# Altium PCB 20K Control Board V1.1.PcbDoc (part 19 of 24)
Units mm, origin at the board's own origin, x right, y up, seen from the top; angles counter-clockwise.
Board outline 132 x 260 mm, 4 copper layers (Top Layer, GND, VCC, Bottom Layer); 1384 components, 779 nets, 4515 pads, 1774 vias.
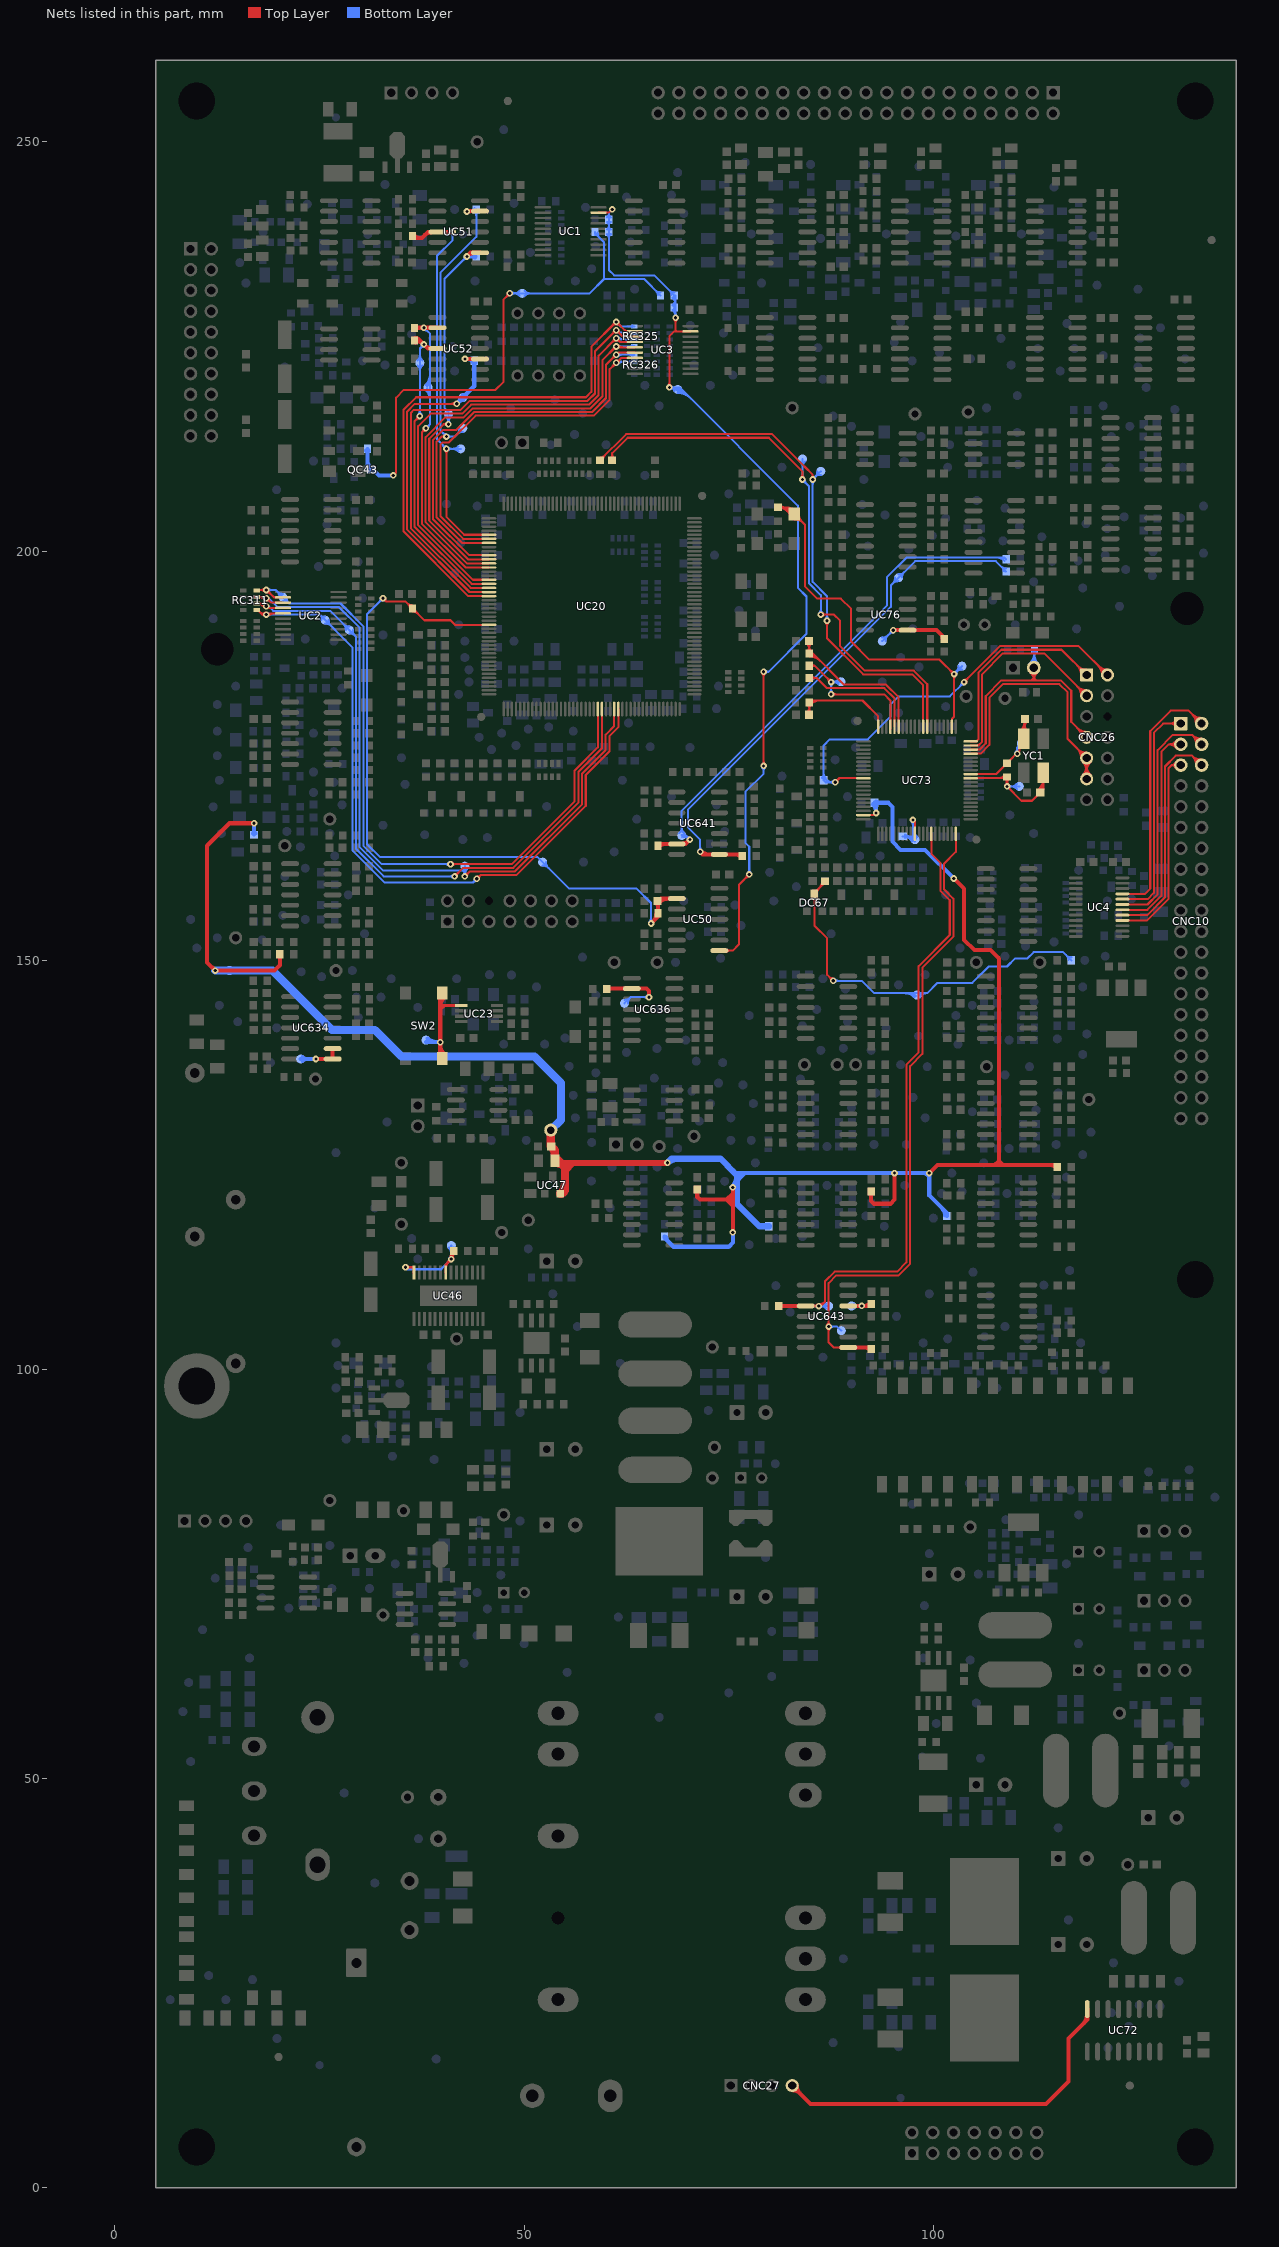
[diagram p21: the nets of this part, all layers, seen from the top]

## Via types
v1: diameter 0.8, hole 0.4, Top Layer to Bottom Layer, tented both sides, 1354 vias
v2: diameter 1.2, hole 0.7, Top Layer to Bottom Layer, 261 vias
v3: diameter 0.8, hole 0.4, Top Layer to Bottom Layer, 58 vias
v4: diameter 1.2, hole 0.7, Top Layer to Bottom Layer, tented top, 58 vias
v5: diameter 0.8, hole 0.4, Top Layer to Bottom Layer, tented top, 22 vias
v6: diameter 1.2, hole 0.7, Top Layer to Bottom Layer, tented both sides, 13 vias
v7: diameter 1.2, hole 0.7, Top Layer to Bottom Layer, tented bottom, 8 vias

## Nets (pads, with @x,y where several pads share a name; then routed paths per layer and width w, separated by ;. In a path a pad name is that pad's centre, name@x,y a point inside that pad or via, vN(x,y) a via of type N, cw(c..) or ccw(c..) an arc to the next point about the centre after c; other vN are vias at no path point) (continued)
NetRC661_2: pad.6@84,211.25 RC661.2 UC73.68 | length 81.2
  Top Layer w0.25: RC661.2@60.52,211.33 ccw(c59.965,211.885) 60.75,211.885 ccw(c61.535,211.885) RC661.2@60.98,211.33 ; RC661.2@60.75,211.1 60.75,211.964 62.636,213.85 79.9,213.85 84,209.75 v1(84,208.75) ; v1(86.25,192.25) 87.85,192.25 88.6,191.5 88.6,188.4 91.6,185.4 97.6,185.4 99.25,183.75 UC73.68@99.25,178.55 ; v1@86.444,192.056 cw(c86.914,191.586) 86.914,192.25 cw(c86.914,192.914) v1@86.444,192.444 ; 84,209.414 ccw(c84.664,209.414) 84.194,208.944 cw(c84.664,209.414) 84,209.414 ; 84,209.414 cw(c83.336,209.414) 83.806,208.944 ccw(c83.336,209.414) 84,209.414
  Bottom Layer w0.25: pad.6@83.699,210.949 cw(c82.974,210.224) 84,210.224 cw(c85.026,210.224) pad.6@84.301,210.949 ; v1@83.806,208.944 ccw(c83.336,209.414) 84,209.414 ccw(c84.664,209.414) v1@84.194,208.944 ; pad.6@84,211.25 v1(84,208.75) 84.8,207.95 84.8,196.064 86.25,194.614 v1(86.25,192.25) ; v1@86.056,192.444 ccw(c85.586,192.914) 86.25,192.914 ccw(c86.914,192.914) v1@86.444,192.444 ; 84.469,208.281 ccw(c84,207.811) 84,208.475 cw(c84,207.811) 84.469,208.281 ; 84.469,208.281 cw(c84.939,208.75) 84.275,208.75 ccw(c84.939,208.75) 84.469,208.281
NetRC665_2: pad.ICT@86.25,209.75 RC665.2 UC73.69 | length 80
  Top Layer w0.25: RC665.2@59.25,211.1 62.45,214.3 80.291,214.3 85.25,209.341 ; RC665.2@59.3,211.425 ccw(c59.3,212.089) 59.769,211.619 ; RC665.2@59.625,211.1 cw(c60.53,211.1) 59.89,211.74 ; 84.25,210.341 85.25,209.341 ; v1@85.073,208.96 ccw(c84.753,209.341) 85.25,209.341 ; v1(85.25,208.75) 85.25,209.341 ; v1@85.427,208.96 cw(c85.747,209.341) 85.25,209.341 ; v1@86.806,191.306 cw(c86.336,190.836) 87,190.836 cw(c87.664,190.836) v1@87.194,191.306 ; v1(87,191.5) 87,189.364 91.414,184.95 97.414,184.95 98.75,183.614 UC73.69@98.75,178.55
  Bottom Layer w0.25: v1@85.056,208.556 cw(c84.586,208.086) 85.25,208.086 cw(c85.914,208.086) v1@85.444,208.556 ; v1@85.25,209.025 ccw(c85.25,209.689) 85.719,209.219 ccw(c86.189,208.75) v1@85.525,208.75 ; pad.ICT@85.825,209.75 cw(c84.799,209.75) 85.524,209.024 cw(c86.25,208.299) pad.ICT@86.25,209.325 ; pad.ICT@86.25,209.75 v1(85.25,208.75) 85.25,196.25 87,194.5 v1(87,191.5) ; v1@86.806,191.694 ccw(c86.336,192.164) 87,192.164 ccw(c87.664,192.164) v1@87.194,191.694
NetRC671_2: pad.ICT@90,107.77 RC671.2 UC643.12 | length 7.8
  Top Layer w0.5: UC643.12@89.6,107.77 v1(91.25,107.77) 92.02,107.77 92.4,108.15 RC671.2@92.4,108.25 ; v1@91.483,107.77 ccw(c91.483,108.867) RC671.2@92.259,108.091
  Bottom Layer w0.25: pad.ICT@90,107.77 v1(91.25,107.77) ; pad.ICT@90.301,107.469 cw(c91.026,106.744) 91.026,107.77 cw(c91.026,108.796) pad.ICT@90.301,108.071 ; v1@91.056,107.576 ccw(c90.586,107.106) 90.586,107.77 ccw(c90.586,108.434) v1@91.056,107.964
NetRC675_1: pad.ICT@97.75,164.75 RC675.1 UC73.30 | length 14.7
  Top Layer w0.25: v1(97.5,167.15) 97.75,166.9 UC73.30@97.75,165.45
  Bottom Layer w0.25: RC675.1@96.53,164.92 cw(c97.085,164.365) 97.085,165.15 cw(c97.085,165.935) RC675.1@96.53,165.38 ; RC675.1@96.705,165.15 cw(c96.705,164.087) pad.ICT@97.602,164.656 ; 97.159,165.15 cw(c97.159,164.375) pad.ICT@97.813,164.79 ; v1@97.306,166.956 cw(c96.836,166.486) 97.5,166.486 cw(c98.164,166.486) v1@97.694,166.956 ; pad.ICT@97.391,164.522 ccw(c96.25,163.799) RC675.1@96.25,165.15 97.9,165.15 pad.ICT@97.5,164.75 ; 97.5,165.776 ccw(c98.776,165.776) pad.ICT@97.874,164.874 ; 97.5,166.38 ccw(c99.38,166.38) pad.ICT@98.051,165.051 ; v1(97.5,167.15) pad.ICT@97.5,164.75 ; pad.ICT@97.75,164.5 pad.ICT@97.5,164.75
NetRC702_1: pad.ICT@93.75,189 RC702.1 UC76.5 | length 11.9
  Top Layer w0.5: v1(95.095,190.345) UC76.5@96.85,190.345 100.405,190.345 101.35,189.4 RC702.1@101.35,189.25 ; 100.938,189.812 cw(c100.426,189.3) RC702.1@101.15,189.3
  Bottom Layer w0.25: pad.ICT@93.75,189 v1(95.095,190.345) ; pad.ICT@93.75,189.425 ccw(c93.75,190.451) 94.476,189.726 ccw(c95.201,189) pad.ICT@94.175,189 ; v1@94.82,190.345 cw(c94.156,190.345) 94.626,189.876 cw(c95.095,189.406) v1@95.095,190.07
NetRC706_1: pad.ICT@62.25,144.75 RC706.1 UC636.2 | length 12.7
  Top Layer w0.5: RC706.1@60.14,146.54 UC636.2@63.15,146.54 64.96,146.54 65.25,146.25 v1(65.25,145.5) ; RC706.1@60.241,146.409 cw(c60.559,146.091) 60.559,146.54 ; RC706.1@60.241,146.691 ccw(c60.607,147.057) 60.607,146.54
  Bottom Layer w0.25: pad.ICT@62.25,144.75 63,145.5 v1(65.25,145.5) ; pad.ICT@62.25,145.175 ccw(c62.25,146.201) 62.976,145.476 ccw(c63.701,144.75) pad.ICT@62.675,144.75 ; v1@65.056,145.306 ccw(c64.586,144.836) 64.586,145.5 ccw(c64.586,146.164) v1@65.056,145.694
NetSW2_3: pad.ICT@38,140.25 SW2.3 SW2.4 UC23.1 | length 16.7
  Top Layer w0.4: 39.775,144 40.25,144.475 ; 40.025,144.475 40.25,144.475 ; UC23.1@42.323,144.475 40.5,144.475 40.25,144.475
  Top Layer w0.5: SW2.3@39.75,138.25 v1(39.75,140) 39.75,145.75 SW2.4@40,146 ; v1@39.75,139.719 ccw(c41.569,139.719) SW2.3@40.283,138.433 ; 39.75,144.281 cw(c41.569,144.281) SW2.4@40.283,145.567
  Bottom Layer w0.5: pad.ICT@38,140 v1(39.75,140) ; pad.ICT@38.212,140.462 ccw(c39.328,141.578) 39.328,140
NetUC634_8: pad.ICT@22.69,137.94 UC634.8 UC634.9 | length 6.3
  Top Layer w0.5: v1(24.56,137.94) UC634.8@26.6,137.94 UC634.9@26.6,139.21
  Bottom Layer w0.5: pad.ICT@22.69,137.94 v1(24.56,137.94) ; pad.ICT@22.902,137.728 cw(c23.414,137.216) 23.414,137.94 cw(c23.414,138.664) pad.ICT@22.902,138.152
OUTOCP: pad.ICT@49.75,231.5 QC43.3 RC498.2 RC518.1 RC519.1 | length 76.7
  Top Layer w0.25: v1(34,209.25) 34.35,209.6 34.35,218.75 35.3,219.7 46.5,219.7 47.45,220.65 47.45,230.7 v1(48.25,231.5) ; v1@47.975,231.5 cw(c47.311,231.5) 47.781,231.031 cw(c48.25,230.561) v1@48.25,231.225
  Bottom Layer w0.25: v1(48.25,231.5) 51,231.5 58,231.5 59.75,233.25 ; v1@48.444,231.306 cw(c48.914,230.836) 48.914,231.5 cw(c48.914,232.164) v1@48.444,231.694 ; pad.ICT@49.449,231.199 ccw(c48.724,230.474) 48.724,231.5 ccw(c48.724,232.526) pad.ICT@49.449,231.801 ; pad.ICT@50.051,231.199 cw(c50.776,230.474) 50.776,231.5 cw(c50.776,232.526) pad.ICT@50.051,231.801 ; RC519.1@58.65,238.625 cw(c58.65,238.082) 59.034,238.466 ; RC519.1@58.65,239 58.65,238.85 59.75,237.75 59.75,233.25 ; RC519.1@58.975,238.95 ccw(c60.001,238.95) 59.276,238.224 ; 66.01,231.89 ccw(c66.65,232.53) RC518.1@66.65,231.625 ; 66.131,231.769 cw(c65.661,231.3) RC518.1@66.325,231.3 ; RC518.1@66.65,231.25 64.65,233.25 59.75,233.25
  Bottom Layer w0.5: RC498.2@30.709,212.309 cw(c30.367,211.967) 30.85,211.967 cw(c31.333,211.967) RC498.2@30.991,212.309 ; 30.85,211.079 ccw(c32.218,211.079) QC43.3@31.251,210.112 ; RC498.2@30.85,212.5 30.85,210.397 QC43.3@31.282,209.965 31.535,209.965 32.25,209.25 v1(34,209.25) ; QC43.3@31.46,209.758 cw(c31.46,209.077) 31.942,209.558
OUTOCP1: pad.ICT@68.75,219.75 RC292.1 RC317.1 RC518.2 RC519.2 UC1.19 UC3.19 UC50.8 | length 142.3
  Top Layer w0.25: UC1.19@59.079,241.354 60.354,241.354 v1(60.75,241.75) ; v1@67.556,220.194 ccw(c67.086,220.664) 67.75,220.664 ccw(c68.414,220.664) v1@67.944,220.194 ; v1(67.75,220) 67.75,226.25 68.354,226.854 ; v1@68.306,228.306 cw(c67.836,227.836) 68.5,227.836 cw(c69.164,227.836) v1@68.694,228.306 ; v1(68.5,228.5) 68.5,227 ; UC3.19@70.329,226.854 68.646,226.854 ; UC50.8@73.85,151.19 75.462,151.19 76.25,151.978 76.25,159.25 v1(77.5,160.5) ; UC50.8@74.774,151.066 cw(c75.072,150.768) 75.072,151.19 cw(c75.072,151.612) UC50.8@74.774,151.314 ; v1@77.225,160.5 cw(c76.561,160.5) 77.031,160.031 cw(c77.5,159.561) v1@77.5,160.225 ; v1@79.056,173.944 ccw(c78.586,174.414) 79.25,174.414 ccw(c79.914,174.414) v1@79.444,173.944 ; v1@79.056,185.056 cw(c78.586,184.586) 79.25,184.586 cw(c79.914,184.586) v1@79.444,185.056 ; v1(79.25,173.75) v1(79.25,185.25) ; 68.354,226.854 68.646,226.854 ; 68.354,226.854 68.5,227 ; 68.5,227 68.646,226.854
  Bottom Layer w0.25: RC519.2@60.12,238.72 cw(c59.565,238.165) 60.35,238.165 cw(c61.135,238.165) RC519.2@60.58,238.72 ; RC519.2@60.12,239.28 ccw(c59.565,239.835) 60.35,239.835 ccw(c61.135,239.835) RC519.2@60.58,239.28 ; RC292.1@60.12,240.22 cw(c59.565,239.665) 60.35,239.665 cw(c61.135,239.665) RC292.1@60.58,240.22 ; RC292.1@60.12,240.78 ccw(c59.565,241.335) 60.35,241.335 ccw(c61.135,241.335) RC292.1@60.58,240.78 ; v1(60.75,241.75) 60.35,241.35 RC292.1@60.35,240.5 60.35,234.352 61,233.702 65.898,233.702 RC518.2@68.35,231.25 RC518.2@68.5,231.1 ; 67.71,231.89 ccw(c68.35,232.53) RC518.2@68.35,231.625 ; 67.831,231.769 cw(c67.361,231.3) RC518.2@68.025,231.3 ; v1@67.944,219.806 cw(c68.414,219.336) 68.414,220 cw(c68.414,220.664) v1@67.944,220.194 ; v1@68.12,220 cw(c68.12,219.496) pad.ICT@68.588,219.685 ; RC317.1@68.12,229.47 cw(c67.203,228.553) v1@68.5,228.553 ; RC317.1@68.12,230.03 ccw(c67.203,230.947) RC518.2@68.5,230.947 ; RC518.2@68.12,230.97 cw(c67.203,230.053) RC317.1@68.5,230.053 ; RC317.1@68.297,229.647 cw(c67.807,229.157) 68.5,229.157 ; RC317.1@68.297,229.853 ccw(c67.807,230.343) 68.5,230.343 ; RC518.2@68.297,231.147 cw(c67.807,230.657) 68.5,230.657 ; v1@68.306,228.694 ccw(c67.836,229.164) 68.5,229.164 ccw(c69.164,229.164) v1@68.694,228.694 ; pad.ICT@68.356,219.591 ccw(c67.75,219.347) v1(67.75,220) 69,220 83.45,205.55 83.45,195.504 84.5,194.454 84.5,189.884 79.866,185.25 ; v1(68.5,228.5) RC518.2@68.5,231.1 ; RC518.2@68.5,231.25 RC518.2@68.5,231.1 ; pad.ICT@68.75,219.325 cw(c68.75,217.092) 70.329,218.671 ; pad.ICT@68.75,219.575 cw(c68.75,217.945) 69.902,219.098 ; pad.ICT@68.75,219.825 cw(c68.75,218.799) 69.476,219.524 ; v1@77.306,160.694 ccw(c76.836,161.164) 77.5,161.164 ccw(c78.164,161.164) v1@77.694,160.694 ; v1(77.5,160.5) 77.5,163.875 77.025,164.35 77.025,170.588 79.25,172.813 v1(79.25,173.75) ; v1@79.056,173.556 cw(c78.586,173.086) 79.25,173.086 cw(c79.914,173.086) v1@79.444,173.556 ; v1(79.25,185.25) 79.866,185.25 ; v1@79.455,185.066 cw(c79.866,184.697) 79.866,185.25 ; v1@79.455,185.434 ccw(c79.866,185.803) 79.866,185.25
P\W\R\_\R\S\: pad.ICT@41.1,115.15 RC500.2 UC46.22 UC46.28 | length 25.3
  Top Layer w0.3: v1(35.5,112.5) 36.25,112.5 ; v1@35.677,112.323 cw(c36.104,111.896) 36.104,112.5 cw(c36.104,113.104) v1@35.677,112.677 ; UC46.28@36.5,112.25 36.25,112.5 ; UC46.28@36.525,111.85 36.525,112.475 36.5,112.5 36.25,112.5 ; UC46.22@40.425,111.85 40.425,112.825 v1(41.1,113.5) 41.1,113.95 ; UC46.22@40.45,112.525 cw(c41.235,112.525) 40.68,113.08 ; v1@40.85,113.5 cw(c40.246,113.5) 40.673,113.073 cw(c41.1,112.646) v1@41.1,113.25 ; v1@40.968,113.712 ccw(c40.82,113.95) 41.1,113.95 ; v1@41.057,113.475 cw(c41.415,113.681) 41.123,113.973 ; v1@41.1,113.454 cw(c41.927,113.454) RC500.2@41.54,114.185 ; 41.1,113.952 cw(c41.664,113.952) RC500.2@41.4,114.45 ; v1@41.232,113.712 cw(c41.38,113.95) 41.1,113.95 ; v1@41.317,113.624 cw(c41.767,113.883) 41.4,114.25 41.1,113.95
  Bottom Layer w0.3: v1@35.465,112.465 ccw(c35.983,112.983) 35.983,112.25 ; v1(35.5,112.5) 35.75,112.25 39.85,112.25 v1(41.1,113.5) ; v1@35.677,112.677 ccw(c36.707,113.707) 36.707,112.25 ; 40.6,113 v1(41.1,113.5) ; pad.ICT@40.817,114.867 cw(c40.134,114.184) 41.1,114.184 cw(c42.066,114.184) pad.ICT@41.383,114.867 ; v1@40.923,113.677 ccw(c40.496,114.104) 41.1,114.104 ccw(c41.704,114.104) v1@41.277,113.677 ; pad.ICT@41.1,115.15 v1(41.1,113.5) ; 40.673,113.073 ccw(c40.246,113.5) 40.85,113.5 cw(c40.246,113.5) 40.673,113.073 ; 40.673,113.073 cw(c41.1,112.646) 41.1,113.25 ccw(c41.1,112.646) 40.673,113.073
PV1_BOOST_DRI1: pad.ICT@20.529,194.354 RC311.4 UC2.2 UC20.68 | length 95.5
  Top Layer w0.25: RC311.4@17.35,195.25 v1(18.5,195.25) ; RC311.4@17.538,195.112 cw(c17.872,194.778) 17.872,195.25 ; v1@18.306,195.056 ccw(c17.836,194.586) 17.836,195.25 ccw(c17.836,195.914) v1@18.306,195.444 ; v1@18.5,194.975 cw(c18.5,194.25) 19.013,194.763 ; v1@18.525,195.25 19.421,194.354 UC2.2@20.529,194.354 ; v1@18.775,195.25 ccw(c19.378,195.25) 18.952,194.824 ; 19.196,194.579 ccw(c19.679,195.062) UC2.2@19.679,194.379 ; v1(41,161.75) 48.48,161.75 56.175,169.445 56.175,173.198 59,176.023 UC20.68@59,180.7 ; v1@41.194,161.556 cw(c41.664,161.086) 41.664,161.75 cw(c41.664,162.414) v1@41.194,161.944
  Bottom Layer w0.25: v1@18.694,195.056 cw(c19.164,194.586) 19.164,195.25 cw(c19.164,195.914) v1@18.694,195.444 ; v1@18.775,195.25 19.633,195.25 21.283,193.6 27.559,193.6 30.35,190.809 30.35,164.014 32.614,161.75 v1(41,161.75) ; pad.ICT@20.104,194.354 ccw(c19.078,194.354) 19.803,195.08 ccw(c20.529,195.805) pad.ICT@20.529,194.779 ; pad.ICT@20.529,193.929 cw(c20.529,192.903) 21.255,193.628 cw(c21.98,194.354) pad.ICT@20.954,194.354 ; v1@40.806,161.556 ccw(c40.336,161.086) 40.336,161.75 ccw(c40.336,162.414) v1@40.806,161.944
PV1_BOOST_DRI2: pad.ICT@42.75,161.5 RC311.3 UC2.3 UC20.72 | length 99.9
  Top Layer w0.25: RC311.3@17.3,194.4 v1@18.35,194.4 ; RC311.3@17.474,194.4 cw(c17.474,193.224) v1@18.306,194.056 ; RC311.3@17.538,194.312 cw(c17.752,194.098) 17.752,194.4 cw(c17.752,194.702) RC311.3@17.538,194.488 ; 18.078,194.4 cw(c18.078,193.828) v1@18.482,194.232 ; v1@18.5,193.975 cw(c18.5,193.25) 19.013,193.763 ; v1@18.525,194.25 19.071,193.704 UC2.3@20.529,193.704 ; v1@18.775,194.25 ccw(c19.378,194.25) 18.952,193.824 ; v1(42.75,160.25) 43.35,160.85 48.853,160.85 57.075,169.072 57.075,172.825 59.95,175.7 59.95,177.586 61,178.636 UC20.72@61,180.7 ; v1@42.75,160.525 ccw(c42.75,161.189) 43.219,160.719 ccw(c43.689,160.25) v1@43.025,160.25
  Bottom Layer w0.25: v1@18.5,193.975 cw(c18.5,192.646) 19.439,193.586 ; v1@18.5,194.225 cw(c18.5,193.5) 19.013,194.013 ; v1@18.775,194.25 19.875,193.15 27.373,193.15 29.9,190.623 29.9,163.827 32.727,161 42.5,161 42.75,160.75 ; pad.ICT@42.449,161.199 cw(c41.724,160.474) 42.75,160.474 cw(c43.776,160.474) pad.ICT@43.051,161.199 ; 42.548,160.952 cw(c42.051,160.454) v1@42.726,160.257 ; v1@42.556,160.444 ccw(c42.086,160.914) 42.75,160.914 ccw(c43.414,160.914) v1@42.944,160.444 ; v1@42.603,160.482 ccw(c42.433,160.75) 42.75,160.75 ; pad.ICT@42.75,161.5 v1(42.75,160.25) 42.75,160.75 ; 42.847,160.653 cw(c42.513,160.319) v1@42.966,160.187 ; v1@42.897,160.482 cw(c43.067,160.75) 42.75,160.75
  other v1: 18.5,194.25
PV2_BOOST_DRI1: pad.ICT@28.636,190.364 RC311.2 UC2.4 UC20.69 | length 94
  Top Layer w0.25: RC311.2@17.538,193.512 cw(c17.752,193.298) 17.752,193.6 cw(c17.752,193.902) RC311.2@17.538,193.688 ; 17.78,193.6 cw(c17.78,192.746) v1@18.48,193.236 ; v1@18.275,193.092 ccw(c17.3,192.411) RC311.2@17.3,193.6 18.125,193.6 v1@18.475,193.25 ; v1@18.696,193.054 UC2.4@20.529,193.054 ; v1(41.5,160.25) 42.55,161.3 48.666,161.3 56.625,169.259 56.625,173.012 59.5,175.887 UC20.69@59.5,180.7 ; v1@41.5,160.525 ccw(c41.5,161.189) 41.969,160.719 ccw(c42.439,160.25) v1@41.775,160.25
  Bottom Layer w0.25: v1@18.75,193.25 18.775,193.25 19.325,192.7 26.3,192.7 29.45,189.55 29.45,163.641 32.841,160.25 v1(41.5,160.25) ; pad.ICT@28.211,190.364 ccw(c27.185,190.364) 27.91,191.09 ccw(c28.636,191.815) pad.ICT@28.636,190.789 ; pad.ICT@28.636,189.939 cw(c28.636,188.913) 29.361,189.639 cw(c30.087,190.364) pad.ICT@29.061,190.364 ; v1@41.306,160.056 ccw(c40.836,159.586) 40.836,160.25 ccw(c40.836,160.914) v1@41.306,160.444
  other v1: 18.5,193.25
PV2_BOOST_DRI2: pad.ICT@25.683,191.567 RC311.1 UC2.5 UC20.73 | length 97.4
  Top Layer w0.25: RC311.1@17.3,192.8 17.45,192.8 18,192.25 ; RC311.1@17.45,192.675 cw(c17.45,192.373) 17.663,192.587 cw(c17.877,192.8) RC311.1@17.575,192.8 ; 17.7,192.55 ccw(c18.068,192.918) v1@18.351,192.481 ; 17.919,192.331 ccw(c18.24,192.652) v1@18.486,192.271 ; v1@18.268,192.103 ccw(c18,191.933) 18,192.25 ; v1@18.268,192.397 cw(c18,192.567) 18,192.25 ; v1(18.5,192.25) 18,192.25 ; v1@18.518,192.232 cw(c18.932,191.818) 18.932,192.404 ; v1@18.654,192.404 UC2.5@20.529,192.404 ; v1@18.694,192.056 cw(c19.536,191.214) UC2.5@19.536,192.404 ; v1(44.212,159.962) 44.65,160.4 ; v1@44.226,160.237 ccw(c44.254,160.796) 44.65,160.4 ; v1@44.487,159.976 cw(c45.046,160.004) 44.65,160.4 ; UC20.73@61.5,180.7 61.5,178.5 60.4,177.4 60.4,175.514 57.525,172.639 57.525,168.886 49.039,160.4 44.65,160.4
  Bottom Layer w0.25: v1@18.694,192.056 cw(c19.164,191.586) 19.164,192.25 cw(c19.164,192.914) v1@18.694,192.444 ; v1@18.75,192.25 25,192.25 ; pad.ICT@25.258,191.586 ccw(c24.375,191.625) 25,192.25 ; pad.ICT@25.664,191.992 cw(c25.625,192.875) 25,192.25 ; pad.ICT@25.683,191.142 cw(c25.683,190.116) 26.408,190.842 cw(c27.134,191.567) pad.ICT@26.108,191.567 ; v1@43.937,159.959 cw(c43.299,159.951) 43.75,159.5 ; v1@44.209,159.687 ccw(c44.201,159.049) 43.75,159.5 ; v1(44.212,159.962) 43.75,159.5 ; 25,192.25 29,188.25 29,163.454 32.954,159.5 43.75,159.5
QA1_DRI_PWM: pad.ICT@42.25,212.5 RC526.2 UC20.5 UC51.4 | length 57.3
  Top Layer w0.25: v1@40.306,212.306 cw(c39.836,211.836) 40.5,211.836 cw(c41.164,211.836) v1@40.694,212.306 ; v1(40.5,212.5) 40.5,204.179 42.679,202 UC20.5@45.7,202
  Top Layer w0.5: RC526.2@36.35,238.25 37.5,238.25 38.25,239 UC51.4@39.4,239 v1(41.25,239) ; RC526.2@36.491,238.591 ccw(c37.316,239.416) 37.316,238.25 ; 37.917,238.667 cw(c38.6,237.984) UC51.4@38.6,238.95 ; 38.075,238.825 cw(c38.436,238.464) UC51.4@38.585,238.952
  Bottom Layer w0.25: v1@40.225,212.5 ccw(c39.561,212.5) 40.031,212.969 ccw(c40.5,213.439) v1@40.5,212.775 ; v1@40.375,212.375 v1@40.5,212.25 ; v1@40.694,212.306 cw(c41.164,211.836) 41.164,212.5 cw(c41.164,213.164) v1@40.694,212.694 ; v1@41.056,238.806 cw(c40.586,238.336) 41.25,238.336 cw(c41.914,238.336) v1@41.444,238.806 ; v1(41.25,239) 41.25,238 39.35,236.1 39.35,213.65 v1(40.5,212.5) pad.ICT@42.25,212.5 ; pad.ICT@41.949,212.199 ccw(c41.224,211.474) 41.224,212.5 ccw(c41.224,213.526) pad.ICT@41.949,212.801
QA2_DRI_PWM: RC326.4 UC3.6 UC20.10 | length 54.5
  Top Layer w0.25: UC20.10@45.7,199.5 43.27,199.5 38.85,203.92 38.85,213.552 40.073,214.775 41.664,214.775 43.889,217 45.25,217 58.296,217 60,218.704 60,222.775 61.225,224 v1(61.25,224) 61.504,224.254 UC3.6@63.529,224.254 ; 60.737,223.513 cw(c61.25,223) v1@61.25,223.725 ; 60.798,223.574 ccw(c60.372,224) v1@60.975,224
  Bottom Layer w0.25: v1(61.25,224) 63.4,224 RC326.4@63.45,223.95 ; v1@61.444,223.806 cw(c61.914,223.336) 61.914,224 cw(c61.914,224.664) v1@61.444,224.194 ; 62.878,224 cw(c62.878,223.528) RC326.4@63.212,223.862
QA3_DRI_PWM: RC326.3 UC3.7 UC20.6 | length 52.3
  Top Layer w0.25: UC20.6@45.7,201.5 42.543,201.5 39.75,204.293 39.75,213 40,213.25 40.75,213.25 40.775,213.275 40.8,213.275 44.075,216.55 58.482,216.55 60.45,218.518 60.45,222.225 v1@61.225,223 ; 60.737,222.513 cw(c61.25,222) v1@61.25,222.725 ; 60.798,222.574 ccw(c60.372,223) v1@60.975,223 ; v1@61.25,223.275 ccw(c61.25,224) 61.763,223.487 ; v1@61.275,223 61.879,223.604 UC3.7@63.529,223.604 ; v1@61.525,223 cw(c62.128,223) 61.702,223.426
  Bottom Layer w0.25: v1(61.25,223) 61.4,223.15 RC326.3@63.45,223.15 ; v1@61.268,222.982 cw(c61.672,222.578) 61.672,223.15 ; v1@61.444,222.806 cw(c62.276,221.974) 62.276,223.15 ; RC326.3@63.212,223.062 ccw(c62.998,222.848) 62.998,223.15 ccw(c62.998,223.452) RC326.3@63.212,223.238
QA4_DRI_PWM: pad.ICT@42.5,215 RC527.2 UC20.7 UC51.13 | length 62.1
  Top Layer w0.25: v1@40.284,213.83 ccw(c39.935,213.556) 39.935,214 ; v1@40.284,214.17 cw(c39.935,214.444) 39.935,214 ; v1(40.5,214) 39.934,214 ; UC20.7@45.7,201 42.407,201 39.3,204.107 39.3,213.365 39.934,214
  Top Layer w0.5: v1@43.04,241.54 UC51.13@44.6,241.54 ; v1@43.106,241.394 cw(c43.459,241.041) 43.459,241.54
  Bottom Layer w0.25: v1@40.225,214 ccw(c39.561,214) 40.031,214.469 ccw(c40.5,214.939) v1@40.5,214.275 ; v1@40.694,213.806 cw(c41.164,213.336) 41.164,214 cw(c41.164,214.664) v1@40.694,214.194 ; pad.ICT@42.075,215 cw(c41.049,215) 41.774,214.274 cw(c42.5,213.549) pad.ICT@42.5,214.575 ; pad.ICT@42.392,214.892 41.5,214 v1(40.5,214) 39.8,214.7 39.8,234.05 44.15,238.4 RC527.2@44.15,241.75 43.9,241.5 v1(43,241.5) ccw(c43,242.697) RC527.2@43.904,241.913 ; v1@43.194,241.306 cw(c43.664,240.836) 43.664,241.5 cw(c43.664,242.164) v1@43.194,241.694 ; 43.548,241.5 ccw(c43.548,242.222) RC527.2@44.093,241.749 ; RC527.2@43.92,241.47 cw(c43.365,240.915) 44.15,240.915 cw(c44.935,240.915) RC527.2@44.38,241.47
QB1_DRI_PWM: pad.ICT@40.75,216.75 RC528.2 UC20.11 UC51.9 | length 53.6
  Top Layer w0.25: v1@40.539,215.324 ccw(c40.162,215.008) 40.162,215.5 ; v1@40.539,215.676 cw(c40.162,215.992) 40.162,215.5 ; v1(40.75,215.5) 40.162,215.5 ; UC20.11@45.7,199 43.134,199 38.4,203.734 38.4,213.738 40.162,215.5
  Top Layer w0.5: v1(43,236) 43.46,236.46 UC51.9@44.6,236.46 ; v1@43.134,236.134 cw(c43.8,235.468) UC51.9@43.8,236.41 ; 43.29,236.29 cw(c43.639,235.941) UC51.9@43.785,236.412
  Bottom Layer w0.25: pad.ICT@40.449,216.449 cw(c39.724,215.724) 40.75,215.724 cw(c41.776,215.724) pad.ICT@41.051,216.449 ; v1@40.556,215.694 ccw(c40.086,216.164) 40.75,216.164 ccw(c41.414,216.164) v1@40.944,215.694 ; v1(40.75,215.5) pad.ICT@40.75,216.75 40.75,217 40.25,217.5 40.25,233.25 v1(43,236) ; v1@42.725,236 cw(c42.061,236) 42.531,235.531 cw(c43,235.061) v1@43,235.725
  Bottom Layer w0.5: v1(43,236) RC528.2@44.06,236 ; RC528.2@44.009,235.859 ccw(c43.667,235.517) 43.667,236 ccw(c43.667,236.483) RC528.2@44.009,236.141
QB2_DRI_PWM: RC325.2 UC3.4 UC20.16 | length 63.5
  Top Layer w0.25: UC20.16@45.7,196.5 43.725,196.5 37.05,203.175 37.05,215.275 38.575,216.8 42.416,216.8 43.516,217.9 45.5,217.9 57.923,217.9 59.1,219.077 59.1,223.875 v1@61.225,226 ; 60.737,225.513 cw(c61.25,225) v1@61.25,225.725 ; 60.798,225.574 ccw(c60.372,226) v1@60.975,226 ; v1@61.262,225.725 cw(c61.289,225.096) 61.734,225.541 ; v1@61.275,226 61.721,225.554 UC3.4@63.529,225.554 ; v1@61.525,226 ccw(c62.128,226) 61.702,225.574
  Bottom Layer w0.25: v1(61.25,226) 61.4,225.85 RC325.2@63.45,225.85 ; v1@61.268,226.018 ccw(c61.672,226.422) 61.672,225.85 ; v1@61.444,226.194 ccw(c62.276,227.026) 62.276,225.85 ; RC325.2@63.212,225.762 ccw(c62.998,225.548) 62.998,225.85 ccw(c62.998,226.152) RC325.2@63.212,225.938
QB3_DRI_PWM: RC325.1 UC3.5 UC20.12 | length 58.7
  Top Layer w0.25: UC20.12@45.7,198.5 42.997,198.5 37.95,203.547 37.95,213.925 40.375,216.35 41.873,216.35 42.603,216.35 43.703,217.45 58.109,217.45 59.55,218.891 59.55,223.325 61.225,225 v1(61.25,225) 61.346,224.904 UC3.5@63.529,224.904 ; 60.737,224.513 cw(c61.25,224) v1@61.25,224.725 ; 60.798,224.574 ccw(c60.372,225) v1@60.975,225 ; v1@61.444,224.806 cw(c61.682,224.568) 61.682,224.904 ; v1@61.444,225.194 ccw(c62.146,225.896) 62.146,224.904
  Bottom Layer w0.25: v1(61.25,225) 63.4,225 RC325.1@63.45,225.05 ; v1@61.444,224.806 cw(c61.914,224.336) 61.914,225 cw(c61.914,225.664) v1@61.444,225.194 ; 62.878,225 ccw(c62.878,225.472) RC325.1@63.212,225.138
QB4_DRI_PWM: pad.ICT@38.25,220 RC529.2 UC20.13 UC52.2 | length 46.7
  Top Layer w0.25: v1@37.725,215 cw(c37.061,215) 37.531,214.531 cw(c38,214.061) v1@38,214.725 ; v1(38,215) 37.5,214.5 37.5,203.361 42.861,198 UC20.13@45.7,198
  Top Layer w0.5: RC529.2@36.6,227.29 v1(37.75,227.29) UC52.2@39.4,227.29 ; RC529.2@36.741,227.159 cw(c37.059,226.841) 37.059,227.29 ; RC529.2@36.741,227.441 ccw(c37.107,227.807) 37.107,227.29
  Bottom Layer w0.25: v1@37.75,227.015 cw(c37.75,226.351) 38.219,226.821 cw(c38.689,227.29) v1@38.025,227.29 ; v1(37.75,227.29) 38.5,226.54 38.5,215.5 v1(38,215) ; pad.ICT@37.949,219.699 cw(c36.62,218.37) 38.5,218.37 ; pad.ICT@37.949,220.301 ccw(c36.62,221.63) 38.5,221.63 ; v1@38,215.275 ccw(c38,215.939) 38.469,215.469 ccw(c38.939,215) v1@38.275,215 ; pad.ICT@38.126,219.876 cw(c37.224,218.974) 38.5,218.974 ; pad.ICT@38.126,220.124 ccw(c37.224,221.026) 38.5,221.026
QC1_DRI_PWM: pad.ICT@37.25,223 RC530.2 UC20.17 UC52.4 | length 48.3
  Top Layer w0.25: v1@36.975,216.5 cw(c36.311,216.5) 36.781,216.031 cw(c37.25,215.561) v1@37.25,216.225 ; v1(37.25,216.5) 36.6,215.85 36.6,202.988 43.588,196 UC20.17@45.7,196
  Top Layer w0.5: RC530.2@36.454,225.962 cw(c36.731,225.466) 37.132,225.868 ; RC530.2@36.593,226 cw(c36.614,225.069) 37.273,225.727 ; RC530.2@36.6,225.75 37.25,225.75 v1(37.75,225.25) 38.25,224.75 UC52.4@39.4,224.75 ; RC530.2@36.698,225.525 cw(c37.066,224.866) v1@37.6,225.4 ; RC530.2@36.741,225.609 cw(c37.083,225.267) 37.083,225.75 cw(c37.083,226.233) RC530.2@36.741,225.891 ; v1@37.925,225.075 ccw(c38.589,225.739) UC52.4@38.599,224.8
  Bottom Layer w0.25: pad.ICT@36.949,222.699 cw(c36.224,221.974) 37.25,221.974 cw(c38.276,221.974) pad.ICT@37.551,222.699 ; pad.ICT@36.949,223.301 ccw(c36.224,224.026) 37.25,224.026 ccw(c38.276,224.026) pad.ICT@37.551,223.301 ; v1@37.056,216.694 ccw(c36.586,217.164) 37.25,217.164 ccw(c37.914,217.164) v1@37.444,216.694 ; v1(37.25,216.5) 37.25,224.75 v1(37.75,225.25) ; v1@37.475,225.25 cw(c36.811,225.25) 37.281,224.781 cw(c37.75,224.311) v1@37.75,224.975
QC2_DRI_PWM: RC325.4 UC3.2 UC20.20 | length 71.6
  Top Layer w0.25: UC20.20@45.7,194.5 43.179,194.5 35.25,202.429 35.25,216.123 35.25,217.25 36.8,218.8 57.55,218.8 58.2,219.45 58.2,224.975 61.225,228 v1(61.25,228) 61.275,228 62.421,226.854 UC3.2@63.529,226.854 ; 60.737,227.513 cw(c61.25,227) 61.25,227.725 cw(c61.25,227) 61.763,227.513 ; 60.798,227.574 ccw(c60.372,228) v1@60.975,228 ; v1@61.525,228 ccw(c62.128,228) 61.702,227.574 ; 62.196,227.079 ccw(c62.679,227.562) UC3.2@62.679,226.879
  Bottom Layer w0.25: v1@61.25,227.725 cw(c61.25,227) 61.763,227.513 ; v1(61.25,228) 61.275,228 61.825,227.45 RC325.4@63.45,227.45 ; v1@61.525,228 ccw(c62.128,228) 61.702,227.574 ; RC325.4@63.212,227.362 ccw(c62.998,227.148) 62.998,227.45 ccw(c62.998,227.752) RC325.4@63.212,227.538
QC3_DRI_PWM: RC325.3 UC3.3 UC20.18 | length 66.4
  Top Layer w0.25: UC20.18@45.7,195.5 43.452,195.5 36.15,202.802 36.15,216.877 36.523,217.25 42.23,217.25 43.33,218.35 45.5,218.35 57.736,218.35 58.65,219.264 58.65,224.425 v1@61.225,227 ; 60.737,226.513 cw(c61.25,226) 61.25,226.725 cw(c61.25,226) 61.763,226.513 ; 60.798,226.574 ccw(c60.372,227) v1@60.975,227 ; v1@61.275,227 62.071,226.204 UC3.3@63.529,226.204 ; v1@61.525,227 ccw(c62.128,227) 61.702,226.574
  Bottom Layer w0.25: v1(61.25,227) 61.525,226.725 63.375,226.725 RC325.3@63.45,226.65 ; 62.817,226.725 cw(c62.817,226.167) RC325.3@63.212,226.562
QC4_DRI_PWM: pad.ICT@42.502,218.752 RC531.2 UC20.19 UC52.10 | length 48.8
  Top Layer w0.25: v1@41.556,217.806 ccw(c41.086,217.336) 41.086,218 ccw(c41.086,218.664) v1@41.556,218.194 ; v1(41.75,218) 36.636,218 35.7,217.064 35.7,202.616 43.316,195 44.25,195 ; 43.72,195 44.25,195 ; UC20.19@45.7,195 44.25,195
  Top Layer w0.5: v1(42.77,223.48) UC52.10@44.6,223.48
  Bottom Layer w0.5: v1(41.75,218) 43.9,220.15 RC531.2@43.9,223.25 RC531.2@43.9,223.5 ; pad.ICT@42.202,218.752 cw(c41.478,218.752) 41.99,218.24 cw(c42.502,217.728) pad.ICT@42.502,218.452 ; pad.ICT@42.502,219.052 ccw(c42.502,219.776) 43.014,219.264 ccw(c43.526,218.752) pad.ICT@42.802,218.752 ; v1(42.77,223.48) RC531.2@43.88,223.48 ; v1@42.983,223.48 cw(c42.983,222.383) RC531.2@43.759,223.159 ; RC531.2@43.759,223.059 cw(c43.417,222.717) 43.9,222.717 cw(c44.383,222.717) RC531.2@44.041,223.059
REF3V: CC294.1 CC356.2 CC437.1 pad.ICT@14,148.75 RC7.1 RC68.1 RC117.1 RC168.1 RC181.1 RC200.1 RC506.1 RC507.1 TP62.1 UC47.2 UC73.19 | length 296.5
  Top Layer w0.25: UC73.19@91.45,167.75 92.75,167.75 v1(93,168)
  Top Layer w0.5: 13.5,148.75 13.75,148.75 ; v1(17,166.75) 14,166.75 11.25,164 11.25,149.75 v1(12.25,148.75) 13.75,148.75 ; RC507.1@20.009,150.559 cw(c19.667,150.217) 20.15,150.217 cw(c20.633,150.217) RC507.1@20.291,150.559 ; RC507.1@20.15,150.75 20.15,149.4 19.5,148.75 13.75,148.75 ; RC168.1@71.009,121.809 cw(c70.667,121.467) 71.15,121.467 cw(c71.633,121.467) RC168.1@71.291,121.809 ; RC168.1@71.15,122 71.15,121.1 71.5,120.75 74.75,120.75 ; v1(75.5,116.75) 75.5,120.75 ; 75.5,120 74.75,120.75 ; 75.5,121.5 74.75,120.75 ; v1(75.5,122.25) 75.5,120.75 ; RC181.1@92.259,121.559 cw(c91.917,121.217) 92.4,121.217 cw(c92.883,121.217) RC181.1@92.541,121.559 ; RC181.1@92.4,121.75 92.4,120.6 92.75,120.25 94.75,120.25 95.25,120.75 v1(95.25,124) ; v1(99.5,124) 100.5,125 114.9,125 RC200.1@115.15,124.75 ; v1(102.5,160) 103.75,158.75 103.75,152.5 105,151.25 107,151.25 108,150.25 108,125.5 ; 107.5,125 108,125.5 ; 108,125 108,125.5 ; 108.5,125 108,125.5 ; 114.184,125 cw(c114.184,123.834) RC200.1@115.009,124.659 ; 74.75,120.75 75.5,120.75
  Top Layer w0.75: 54.5,125.25 56,125.25 ; 55,124.25 56,125.25 ; v1(67.5,125.25) 56,125.25
  Top Layer w1: CC294.1@53.25,127.3 TP62.1@53.25,129.25 ; CC356.2@53.75,125.25 cw(c53.75,123.439) 55.03,124.72 ; CC356.2@53.75,126.164 ccw(c52.214,126.164) CC294.1@53.3,127.25 53.75,126.8 CC356.2@53.75,125.5 54.25,125.5 54.5,125.25 55,124.75 55,122.095 ; UC47.2@54.405,121.5 55,122.095 ; UC47.2@54.408,121.457 ccw(c54.361,122.095) 55,122.095 ; UC47.2@54.435,121.47 ccw(c53.072,122.833) 55,122.833 ; CC356.2@53.758,125.251 cw(c53.963,124.013) 54.85,124.9 ccw(c53.963,124.013) CC356.2@53.758,125.251
  Bottom Layer w0.5: RC506.1@16.859,165.491 ccw(c16.517,165.833) 17,165.833 ccw(c17.483,165.833) RC506.1@17.141,165.491 ; RC506.1@17,165.35 v1(17,166.75) ; RC7.1@67.15,116.25 67.15,116.1 68.25,115 75,115 75.5,115.5 v1(75.5,116.75) ; RC7.1@67.35,116.2 ccw(c68.074,116.2) 67.562,115.688 ; v1@75.65,122.25 cw(c76.616,122.25) 75.933,122.933 ; 75.75,124 v1(95.25,124) v1(99.5,124) 99.5,123.5 ; 77,124 75.5,122.5 v1(75.5,122.25) 75.5,120.75 78.75,117.5 ; CC437.1@92.623,169.073 cw(c91.714,168.164) v1@93,168.164 ; CC437.1@92.977,169.073 cw(c93.404,168.646) 93.404,169.25 cw(c93.404,169.854) CC437.1@92.977,169.427 ; v1(93,168) 93,169.05 CC437.1@92.8,169.25 94.5,169.25 95,168.75 95,164.5 96,163.5 99,163.5 v1(102.5,160) ; 99,124 99.5,123.5 ; 101.096,119.654 cw(c100.243,118.8) RC117.1@101.45,118.8 ; RC117.1@101.65,118.75 101.65,119.1 99.5,121.25 99.5,123.5
  Bottom Layer w0.75: v1(67.5,125.25) 68,125.75 74,125.75 ; v1@67.518,125.232 cw(c68.767,123.983) 68.767,125.75 ; v1@75.482,122.232 cw(c74.233,120.983) 76,120.983 ; v1@75.482,122.268 ccw(c74.233,123.517) 76,123.517 ; 75.5,124.25 74,125.75 ; RC68.1@79.9,117.5 78.75,117.5 76,120.25 76,123.75 74,125.75
  Bottom Layer w1: v1(12.25,148.75) 19.25,148.75 26.5,141.5 31.75,141.5 35,138.25 51.25,138.25 54.5,135 54.5,130.5 TP62.1@53.25,129.25
RELAY-CTRL-R1: CNC10.5 UC4.16 | length 25.9
  Top Layer w0.25: UC4.16@122.85,154.875 UC4.16@123.1,154.875 126.125,154.875 128.75,157.5 128.75,173.5 129.1,173.85 ; CNC10.5@129.603,173.538 ccw(c129.1,173.288) 129.1,173.85 ; CNC10.5@129.603,174.162 cw(c129.1,174.412) 129.1,173.85 ; CNC10.5@130.23,173.85 129.1,173.85
RELAY-CTRL-R2: CNC10.6 UC4.17 | length 31.9
  Top Layer w0.25: UC4.17@122.85,155.525 UC4.17@123.1,155.525 126.139,155.525 128.3,157.686 128.3,173.686 129.614,175 131.62,175 ; CNC10.6@132.07,173.869 ccw(c130.532,173.912) 131.62,175 ; CNC10.6@132.32,173.862 ccw(c131.331,173.89) 132.031,174.589 ccw(c132.73,175.289) CNC10.6@132.758,174.3 ; CNC10.6@132.751,174.55 cw(c132.708,176.088) 131.62,175 ; CNC10.6@132.77,173.85 131.62,175
RELAY-CTRL-S1: CNC10.3 UC4.18 | length 29.6
  Top Layer w0.25: UC4.18@122.85,156.175 UC4.18@123.1,156.175 126.152,156.175 127.85,157.873 127.85,175.5 128.74,176.39 ; CNC10.3@129.691,175.943 ccw(c128.74,175.154) 128.74,176.39 ; CNC10.3@129.691,176.837 cw(c128.74,177.626) 128.74,176.39 ; CNC10.3@129.884,176.103 ccw(c129.272,175.596) 129.272,176.39 ccw(c129.272,177.184) CNC10.3@129.884,176.677 ; CNC10.3@130.23,176.39 128.74,176.39
RELAY-CTRL-S2: CNC10.4 UC4.19 | length 33.4
  Top Layer w0.25: UC4.19@122.85,156.825 UC4.19@123.1,156.825 126.166,156.825 127.4,158.059 127.4,175.686 129.254,177.54 131.62,177.54 ; CNC10.4@132.07,176.409 ccw(c130.532,176.452) 131.62,177.54 ; CNC10.4@132.32,176.402 ccw(c131.331,176.43) 132.031,177.129 ccw(c132.73,177.829) CNC10.4@132.758,176.84 ; CNC10.4@132.751,177.09 cw(c132.708,178.628) 131.62,177.54 ; CNC10.4@132.77,176.39 131.62,177.54
RELAY-CTRL-T1: CNC10.1 UC4.20 | length 29.2
  Top Layer w0.25: UC4.20@122.85,157.475 UC4.20@123.1,157.475 126.179,157.475 126.95,158.246 126.95,173.5 126.95,177.814 128.066,178.93 129,178.93 ; CNC10.1@129.628,178.572 ccw(c129,178.199) 129,178.93 ; CNC10.1@129.628,179.288 cw(c129,179.661) 129,178.93 ; CNC10.1@130.23,178.93 129,178.93
RELAY-CTRL-T2: CNC10.2 UC4.21 | length 35.5
  Top Layer w0.25: UC4.21@122.85,158.125 125.875,158.125 126.5,158.75 126.5,178 129,180.5 131.2,180.5 CNC10.2@132.77,178.93 ; CNC10.2@132.07,178.93 ccw(c130.38,178.93) 131.575,180.125 ccw(c132.77,181.32) CNC10.2@132.77,179.63 ; CNC10.2@132.32,178.93 ccw(c131.234,178.93) 132.002,179.698 ccw(c132.77,180.466) CNC10.2@132.77,179.38
RESET-IN: CC47.2 pad.ICT@52.25,162 RC225.2 RC534.2 UC20.27 UC50.2 | length 102.6
  Top Layer w0.25: v1(32.75,194.25) 33.175,193.825 ; v1@32.77,193.976 cw(c32.808,193.458) 33.175,193.825 ; v1@33.024,194.23 ccw(c33.542,194.192) 33.175,193.825 ; 35.71,193.64 ccw(c36.35,194.28) RC225.2@36.35,193.375 ; 35.831,193.519 cw(c35.361,193.05) RC225.2@36.025,193.05 ; RC225.2@36.35,192.625 cw(c36.35,191.72) 36.99,192.36 ; RC225.2@36.675,192.95 ccw(c37.339,192.95) 36.869,192.481 ; UC20.27@45.7,191 41.55,191 41,191.55 37.8,191.55 RC225.2@36.35,193 35.525,193.825 33.175,193.825
  Top Layer w0.5: v1(65.5,154.5) 66.35,155.35 RC534.2@66.35,155.75 66.35,157.2 66.69,157.54 UC50.2@68.65,157.54 ; v1@65.761,154.761 ccw(c64.822,155.7) RC534.2@66.15,155.7 ; CC47.2@66.123,157.073 cw(c65.576,156.526) 66.35,156.526 ; RC534.2@66.209,155.941 ccw(c65.867,156.283) 66.35,156.283 ccw(c66.833,156.283) RC534.2@66.491,155.941 ; CC47.2@66.422,157.468 ccw(c66.634,157.846) 66.94,157.54 CC47.2@66.6,157.2 ; CC47.2@66.477,157.073 cw(c67.604,155.946) UC50.2@67.604,157.54
  Bottom Layer w0.25: v1@32.475,194.25 cw(c31.811,194.25) 32.281,193.781 cw(c32.75,193.311) v1@32.75,193.975 ; v1(32.75,194.25) 30.8,192.3 30.8,164.2 32.4,162.6 51.65,162.6 55.5,158.75 63.75,158.75 65.5,157 v1(65.5,154.5) ; pad.ICT@52.25,161.575 cw(c52.25,160.549) 52.976,161.274 cw(c53.701,162) pad.ICT@52.675,162 ; v1@65.306,154.694 ccw(c64.836,155.164) 65.5,155.164 ccw(c66.164,155.164) v1@65.694,154.694
RX-FROM-PC: CNC27.4 UC72.8 | length 48.7
  Top Layer w0.5: CNC27.4@82.75,11.95 cw(c82.75,10.622) 83.689,11.561 cw(c84.628,12.5) CNC27.4@83.3,12.5 ; CNC27.4@82.75,12.5 85,10.25 113.75,10.25 116.5,13 116.5,18.25 118.805,20.555 UC72.8@118.805,21.85 ; 118.37,20.12 ccw(c117.439,21.05) UC72.8@118.755,21.05
S-232-RX: pad.ICT@88.75,104.75 RC635.1 UC73.40 UC643.8 | length 85.8
  Top Layer w0.25: v1@87.006,105.056 cw(c86.536,104.586) 87.2,104.586 cw(c87.864,104.586) v1@87.394,105.056 ; v1@87.006,105.444 ccw(c86.536,105.914) 87.2,105.914 ccw(c87.864,105.914) v1@87.394,105.444 ; UC643.8@88.676,102.566 ccw(c88.378,102.268) 88.378,102.69 ccw(c88.378,103.112) UC643.8@88.676,102.814 ; UC643.8@89.6,102.69 87.81,102.69 87.2,103.3 87.2,104.25 87.2,110.564 88.136,111.5 95.75,111.5 97.15,112.9 97.15,137.059 98.65,138.559 98.65,149.102 102.452,152.904 102.452,157.53 101.3,158.682 101.3,161.8 102.75,163.25 UC73.40@102.75,165.45
  Top Layer w0.5: UC643.8@89.6,102.69 RC635.1@92.4,102.69 ; 91.579,102.69 cw(c91.579,101.729) RC635.1@92.259,102.409
  Bottom Layer w0.25: v1(87.2,105.25) 88.25,105.25 pad.ICT@88.75,104.75 ; v1@87.394,105.056 cw(c87.864,104.586) 87.864,105.25 cw(c87.864,105.914) v1@87.394,105.444
S-232-TX: pad.ICT@87.2,107.75 RC382.2 UC73.34 UC643.3 | length 82.3
  Top Layer w0.25: UC643.3@84.4,107.77 86.27,107.77 86.75,108.25 ; UC643.3@85.288,107.77 cw(c85.288,107.038) v1@85.806,107.556 ; UC643.3@85.324,107.646 cw(c85.622,107.348) 85.622,107.77 cw(c85.622,108.192) UC643.3@85.324,107.894 ; UC643.3@85.384,107.77 ccw(c85.384,108.366) v1@85.806,107.944 ; v1@86.004,107.775 ccw(c86.077,108.231) 86.404,107.904 ; v1@86.044,108.022 ccw(c86.173,108.827) 86.75,108.25 ; UC73.34@99.75,165.45 99.75,163 100.85,161.9 100.85,158.496 102.002,157.344 102.002,153.09 98.2,149.288 98.2,138.746 96.7,137.246 96.7,113.086 95.564,111.95 87.95,111.95 86.75,110.75 86.75,108.25
  Top Layer w0.5: RC382.2@81.1,107.75 UC643.3@84.38,107.75 ; RC382.2@81.241,107.609 cw(c81.583,107.267) 81.583,107.75 cw(c81.583,108.233) RC382.2@81.241,107.891
  Bottom Layer w0.25: v1(86,107.75) pad.ICT@87.2,107.75 ; v1@86.194,107.556 cw(c86.664,107.086) 86.664,107.75 cw(c86.664,108.414) v1@86.194,107.944 ; pad.ICT@86.899,107.449 ccw(c86.174,106.724) 86.174,107.75 ccw(c86.174,108.776) pad.ICT@86.899,108.051
S-SEL_C: pad.ICT@69.25,165.25 RC196.2 RC685.1 UC641.6 | length 70.6
  Top Layer w0.5: RC685.1@66.491,163.909 cw(c67.219,163.181) 67.219,164.21 ; RC685.1@66.56,164.21 UC641.6@68.65,164.21 ; UC641.6@67.96,164.21 UC641.6@68.65,164.21 ; UC641.6@69.4,164.26 ccw(c69.4,165.129) v1@70.015,164.515 ; v1(70.25,164.75) 69.71,164.21 UC641.6@68.65,164.21
  Bottom Layer w0.25: pad.ICT@68.949,165.551 ccw(c68.224,166.276) 69.25,166.276 ccw(c70.276,166.276) pad.ICT@69.551,165.551 ; pad.ICT@69.234,165.323 cw(c69.381,164.666) 69.858,165.142 ; pad.ICT@69.288,165.079 cw(c69.499,164.141) v1@70.179,164.821 ; v1@69.975,164.75 ccw(c69.311,164.75) 69.781,165.219 ccw(c70.25,165.689) v1@70.25,165.025 ; v1(70.25,164.75) 69.25,165.75 69.25,168.27 94.35,193.37 94.35,196.85 96.725,199.225 108.675,199.225 RC196.2@108.9,199 ; 107.693,199.225 cw(c107.693,197.843) RC196.2@108.67,198.82 ; 108.296,199.225 cw(c108.296,198.446) RC196.2@108.847,198.997
S-SEL_D: pad.ICT@95.75,196.75 RC197.2 RC687.1 UC641.8 | length 72.6
  Top Layer w0.5: v1(71.5,163.25) 71.81,162.94 UC641.8@73.85,162.94 ; v1@71.606,163.356 ccw(c72.611,164.361) 72.611,162.94 ; UC641.8@74.81,162.94 UC641.8@73.85,162.94 ; 75.829,162.94 cw(c75.829,161.979) RC687.1@76.509,162.659 ; RC687.1@76.21,162.94 UC641.8@73.85,162.94
  Bottom Layer w0.25: v1@71.306,163.444 ccw(c70.836,163.914) 71.5,163.914 ccw(c72.164,163.914) v1@71.694,163.444 ; v1(71.5,163.25) 71.5,164.75 70,166.25 70,168.384 94.8,193.184 94.8,195.8 97.775,198.775 107.625,198.775 RC197.2@108.9,197.5 RC197.2@108.75,197.5 ; pad.ICT@95.325,196.75 cw(c94.299,196.75) 95.024,196.024 cw(c95.75,195.299) pad.ICT@95.75,196.325 ; pad.ICT@95.75,197.175 ccw(c95.75,198.201) 96.476,197.476 ccw(c97.201,196.75) pad.ICT@96.175,196.75 ; 108.26,198.14 ccw(c108.9,198.78) RC197.2@108.9,197.875 ; 108.381,198.019 cw(c107.911,197.55) RC197.2@108.575,197.55
S-SPICLK: pad.ICT@88.709,184.041 RC677.1 UC73.77 | length 25
  Top Layer w0.25: RC677.1@84.85,186 85.5,186 ; RC677.1@85.11,185.805 cw(c85.5,185.513) 85.5,186 ; RC677.1@85.11,186.195 ccw(c85.5,186.487) 85.5,186 ; v1@87.225,184 ccw(c86.561,184) 87.031,184.469 ccw(c87.5,184.939) v1@87.5,184.275 ; v1(87.5,182.5) 94,182.5 94.75,181.75 UC73.77@94.75,178.55 UC73.77@94.75,178.275 ; v1(87.5,184) 85.5,186 ; v1@87.694,182.306 cw(c88.164,181.836) 88.164,182.5 cw(c88.164,183.164) v1@87.694,182.694
  Bottom Layer w0.25: v1@87.306,182.694 ccw(c86.836,183.164) 87.5,183.164 ccw(c88.164,183.164) v1@87.694,182.694 ; v1@87.306,183.806 cw(c86.836,183.336) 87.5,183.336 cw(c88.164,183.336) 87.694,183.806 cw(c88.164,183.336) 88.164,184 cw(c88.164,184.664) v1@87.694,184.194 ; v1(87.5,182.5) v1(87.5,184) pad.ICT@88.75,184 ; v1@87.585,184 ccw(c87.585,185.165) pad.ICT@88.409,184.341 ; v1@87.781,184 cw(c87.781,183.113) pad.ICT@88.409,183.74
S-SPISIMO: CC434.2 RC681.1 UC73.80 | length 16.7
  Top Layer w0.25: CC434.2@84.535,180.265 ccw(c83.774,181.026) RC681.1@84.85,181.026 ; RC681.1@84.62,181.22 cw(c84.065,180.665) 84.85,180.665 cw(c85.635,180.665) RC681.1@85.08,181.22 ; CC434.2@84.85,180.05 RC681.1@84.85,181.5 ; 84.85,180.785 ccw(c85.585,180.785) CC434.2@85.065,180.265 ; RC681.1@84.903,181.497 cw(c85.514,180.886) 85.514,181.75 ; RC681.1@85,181.5 RC681.1@84.85,181.5 ; RC681.1@85.08,181.32 cw(c86.117,180.283) 86.117,181.75 ; UC73.80@93.25,178.55 93.25,179.838 91.338,181.75 85.1,181.75 RC681.1@84.85,181.5
S-SPISOMI: RC221.2 UC73.76 | length 16.1
  Top Layer w0.25: RC221.2@84.85,184.5 85.75,184.5 87,183.25 94,183.25 95.25,182 UC73.76@95.25,178.55 ; RC221.2@85.08,184.27 cw(c85.635,183.715) 85.635,184.5 cw(c85.635,185.285) RC221.2@85.08,184.73
S-SPISTE: CC431.1 RC672.1 UC73.75 | length 23.8
  Top Layer w0.25: CC431.1@84.535,188.735 cw(c83.895,188.095) 84.8,188.095 cw(c85.705,188.095) CC431.1@85.065,188.735 ; RC672.1@84.62,187.78 ccw(c84.186,188.214) 84.8,188.214 ; RC672.1@84.8,187.55 CC431.1@84.8,189 ; 84.8,188.455 ccw(c85.755,188.455) RC672.1@85.08,187.78 ; RC672.1@84.85,187.125 cw(c84.85,185.254) 86.173,186.577 ; RC672.1@84.85,187.375 cw(c84.85,186.108) 85.746,187.004 ; RC672.1@84.85,187.5 85.25,187.5 89.05,183.7 94.186,183.7 95.75,182.136 UC73.75@95.75,178.55 ; RC672.1@84.85,187.625 cw(c84.85,186.961) 85.319,187.431
S-T\R\S\T\: CNC26.2 RC693.1 UC73.10 | length 62.5
  Top Layer w0.25: v1(88,171.75) 88.5,172.25 UC73.10@91.45,172.25 ; v1@88,172.025 ccw(c88,172.689) 88.469,172.219 ccw(c88.939,171.75) v1@88.275,171.75 ; v1(103.75,184) 103.75,184.023 108.127,188.4 117.74,188.4 CNC26.2@121.27,184.87 ; v1@103.75,184.275 ccw(c103.75,184.884) 104.181,184.453 ; v1@104.025,184 cw(c104.744,184) 104.236,184.508 ; CNC26.2@120.595,184.87 ccw(c118.965,184.87) 120.118,186.022 ccw(c121.27,187.175) CNC26.2@121.27,185.545 ; CNC26.2@120.845,184.87 ccw(c119.819,184.87) 120.544,185.596 ccw(c121.27,186.321) CNC26.2@121.27,185.295
  Bottom Layer w0.25: RC693.1@86.37,172.28 ccw(c85.815,172.835) 86.6,172.835 ccw(c87.385,172.835) RC693.1@86.83,172.28 ; RC693.1@86.6,172 86.6,176.25 87.35,177 92,177 94.75,179.75 94.75,181.25 95.75,182.25 102,182.25 v1(103.75,184) ; RC693.1@86.653,172.003 ccw(c87.264,172.614) 87.264,171.75 ; RC693.1@86.83,172.18 ccw(c87.867,173.217) v1@87.867,171.75 ; RC693.1@86.85,171.75 v1(88,171.75) ; v1@87.806,171.556 ccw(c87.336,171.086) 87.336,171.75 ccw(c87.336,172.414) v1@87.806,171.944 ; v1@103.475,184 cw(c102.811,184) 103.281,183.531 cw(c103.75,183.061) v1@103.75,183.725
S-TCK: CNC26.9 CNC26.11 UC73.57 | length 43.2
  Top Layer w0.25: UC73.57@104.55,175.25 105.773,175.25 106.85,176.327 106.85,182.1 108.5,183.75 115.395,183.75 116.395,182.75 116.395,177.045 CNC26.9@118.73,174.71 CNC26.11@118.73,172.17 ; CNC26.9@118.055,174.71 ccw(c116.425,174.71) 117.578,175.862 ccw(c118.73,177.015) CNC26.9@118.73,175.385 ; CNC26.11@118.253,172.647 ccw(c117.1,173.8) 118.73,173.8 ccw(c120.36,173.8) CNC26.11@119.207,172.647 ; CNC26.9@118.253,174.233 cw(c117.1,173.08) 118.73,173.08 cw(c120.36,173.08) CNC26.9@119.207,174.233 ; CNC26.9@118.305,174.71 ccw(c117.279,174.71) 118.004,175.436 ccw(c118.73,176.161) CNC26.9@118.73,175.135 ; CNC26.11@118.429,172.471 ccw(c117.704,173.196) 118.73,173.196 ccw(c119.756,173.196) CNC26.11@119.031,172.471 ; CNC26.9@118.429,174.409 cw(c117.704,173.684) 118.73,173.684 cw(c119.756,173.684) CNC26.9@119.031,174.409
S-TDI: CNC26.3 UC73.59 | length 30.4
  Top Layer w0.25: UC73.59@104.55,176.25 105.5,176.25 105.95,176.7 105.95,184.95 108.5,187.5 113.56,187.5 CNC26.3@118.73,182.33 ; UC73.59@105.3,176.275 ccw(c105.3,176.818) 105.684,176.434 ; CNC26.3@118.055,182.33 ccw(c116.425,182.33) 117.578,183.482 ccw(c118.73,184.635) CNC26.3@118.73,183.005 ; CNC26.3@118.305,182.33 ccw(c117.279,182.33) 118.004,183.056 ccw(c118.73,183.781) CNC26.3@118.73,182.755
S-TDO: CNC26.7 JC2.2 RC636.1 UC73.58 | length 44.3
  Top Layer w0.25: UC73.58@104.55,175.75 105.636,175.75 106.4,176.514 106.4,182.286 108.314,184.2 115.582,184.2 116.845,182.936 116.845,179.135 CNC26.7@118.73,177.25 ; JC2.2@111.811,185.189 cw(c111.018,184.22) 112.27,184.22 ; JC2.2@111.969,185.382 cw(c111.45,184.748) 112.27,184.748 cw(c113.09,184.748) JC2.2@112.571,185.382 ; 111.97,184.2 112.27,184.5 ; JC2.2@112.27,185.75 112.27,184.75 112.27,184.5 ; 112.57,184.2 112.27,184.5 ; JC2.2@112.729,185.189 ccw(c113.522,184.22) 112.27,184.22 ; CNC26.7@118.055,177.25 ccw(c116.425,177.25) 117.578,178.402 ccw(c118.73,179.555) CNC26.7@118.73,177.925 ; CNC26.7@118.305,177.25 ccw(c117.279,177.25) 118.004,177.976 ccw(c118.73,178.701) CNC26.7@118.73,177.675 ; 112.27,184.22 112.27,184.5
  Bottom Layer w0.25: JC2.2@111.757,186.263 ccw(c110.327,187.693) RC636.1@112.35,187.693 ; JC2.2@111.934,186.086 ccw(c110.93,187.09) 112.35,187.09 ; RC636.1@112.12,187.72 cw(c111.565,187.165) 112.35,187.165 cw(c113.135,187.165) RC636.1@112.58,187.72 ; JC2.2@112.35,185.83 RC636.1@112.35,188 ; 112.35,186.704 ccw(c113.224,186.704) JC2.2@112.606,186.086 ; 112.35,187.307 ccw(c113.827,187.307) JC2.2@112.783,186.263
S-TMS: CNC26.1 UC73.60 | length 29
  Top Layer w0.25: UC73.60@104.55,176.75 105.25,176.75 105.5,177 105.5,185.136 108.314,187.95 115.65,187.95 CNC26.1@118.73,184.87 ; CNC26.1@118.055,184.87 ccw(c116.425,184.87) 117.578,186.022 ccw(c118.73,187.175) CNC26.1@118.73,185.545 ; CNC26.1@118.305,184.87 ccw(c117.279,184.87) 118.004,185.596 ccw(c118.73,186.321) CNC26.1@118.73,185.295
S-X1: CC404.2 pad.ICT@110.75,176.5 RC624.1 UC73.52 YC1.1 | length 17.5
  Top Layer w0.25: UC73.52@104.55,172.75 107.65,172.75 RC624.1@109,174.1 110.5,175.6 YC1.1@110.5,176.55 ; YC1.1@110.643,178.057 ccw(c109.3,179.4) CC404.2@111.2,179.4 ; YC1.1@110.82,177.88 ccw(c109.903,178.797) 111.2,178.797 ; CC404.2@110.935,179.235 cw(c110.295,178.595) 111.2,178.595 cw(c112.105,178.595) CC404.2@111.465,179.235 ; YC1.1@111.2,177.25 CC404.2@111.2,179.5 ; 111.2,178.676 ccw(c112.076,178.676) YC1.1@111.457,178.057
  Bottom Layer w0.25: v1@110.056,175.444 ccw(c109.586,175.914) 110.25,175.914 ccw(c110.914,175.914) v1@110.444,175.444 ; v1(110.25,175.25) 110.25,176 pad.ICT@110.75,176.5
S-X2: CC403.2 pad.ICT@110.5,171.25 RC624.2 UC73.51 YC1.3 | length 25.1
  Top Layer w0.25: UC73.51@104.55,172.25 RC624.2@108.85,172.25 ; 107.803,172.25 ccw(c107.803,173.547) RC624.2@108.72,172.63 ; 108.407,172.25 ccw(c108.407,172.943) RC624.2@108.897,172.453 ; RC624.2@108.77,172.17 cw(c108.215,171.615) 109,171.615 cw(c109.785,171.615) RC624.2@109.23,172.17 ; v1@108.806,171.444 ccw(c108.336,171.914) 109,171.914 ccw(c109.664,171.914) v1@109.194,171.444 ; RC624.2@109,172.4 v1(109,171.25) 110.75,169.5 112.05,169.5 CC403.2@113.05,170.5 113.45,170.9 YC1.3@113.45,172.9 ; CC403.2@112.785,170.765 ccw(c111.179,172.371) YC1.3@113.45,172.371 ; CC403.2@112.962,170.588 ccw(c111.783,171.767) YC1.3@113.45,171.767 ; CC403.2@113.138,170.412 ccw(c112.386,171.164) 113.45,171.164
  Bottom Layer w0.25: v1(109,171.25) pad.ICT@110.5,171.25 ; v1@109.194,171.056 cw(c109.664,170.586) 109.664,171.25 cw(c109.664,171.914) v1@109.194,171.444 ; pad.ICT@110.199,170.949 ccw(c109.474,170.224) 109.474,171.25 ccw(c109.474,172.276) pad.ICT@110.199,171.551
S.AUX.SHUT: DC38.1 pad.ICT@103.5,185.946 RC153.2 UC73.62 | length 61.4
  Top Layer w0.25: RC153.2@81.28,205.12 cw(c81.835,204.565) 81.835,205.35 cw(c81.835,206.135) RC153.2@81.28,205.58 ; RC153.2@81.392,205.35 cw(c81.392,203.902) DC38.1@82.705,204.513 ; 81.784,205.35 cw(c81.784,204.084) DC38.1@82.932,204.618 ; 82.177,205.35 cw(c82.177,204.267) DC38.1@83.159,204.724 ; DC38.1@82.432,204.74 ccw(c81.791,204.841) 82.25,205.3 ccw(c82.608,205.658) DC38.1@82.792,205.186 ; DC38.1@82.479,204.407 ccw(c81,203.719) RC153.2@81,205.35 82.2,205.35 DC38.1@83,204.55 84.3,203.25 84.3,195.7 85.8,194.2 88.686,194.2 89.95,192.936 89.95,188.959 92.159,186.75 100.75,186.75 v1(102.527,184.973) 102.527,179.777 102.25,179.5 UC73.62@102.25,178.55 ; DC38.1@83,203.875 cw(c83,202.245) 84.152,203.398 ; DC38.1@83,204.125 cw(c83,203.099) 83.726,203.824 ; DC38.1@83.575,204.45 ccw(c84.722,204.45) 83.911,203.639 ; v1@102.252,184.973 ccw(c101.588,184.973) 102.058,185.442 ccw(c102.527,185.912) v1@102.527,185.248 ; UC73.62@102.275,179.3 cw(c102.818,179.3) 102.434,179.684 ; v1@102.333,184.778 cw(c101.863,184.309) 102.527,184.309 cw(c103.191,184.309) v1@102.722,184.778
  Bottom Layer w0.25: v1(102.527,184.973) pad.ICT@103.5,185.946 ; v1@102.527,185.248 ccw(c102.527,185.912) 102.997,185.442 ccw(c103.466,184.973) v1@102.802,184.973 ; pad.ICT@103.075,185.946 cw(c102.049,185.946) 102.774,185.22 cw(c103.5,184.495) pad.ICT@103.5,185.521
S.DCI-R: DC67.3 pad.ICT@98,145.75 RC56.1 RC655.1 | length 57.4
  Top Layer w0.25: DC67.3@85.23,157.619 cw(c84.663,157.052) 85.465,157.052 cw(c86.267,157.052) DC67.3@85.7,157.619 ; DC67.3@85.465,158.542 ccw(c85.465,159.331) 86.023,158.773 ; DC67.3@85.797,158.21 cw(c86.612,158.21) 86.036,158.786 ; 86.004,158.754 ccw(c85.108,159.65) RC655.1@86.375,159.65 ; 86.431,159.181 ccw(c85.961,159.65) RC655.1@86.625,159.65 ; RC655.1@86.487,159.237 cw(c86.7,159.023) RC655.1@86.7,159.325 ; RC655.1@86.75,159.5 85.465,158.215 DC67.3@85.465,158.032 85.465,154.25 87.025,152.69 87.025,148.225 v1(87.75,147.5) ; v1@87.475,147.5 ccw(c86.811,147.5) 87.281,147.969 ccw(c87.75,148.439) v1@87.75,147.775
  Bottom Layer w0.25: v1(87.75,147.5) 91.25,147.5 92.769,145.981 97.75,145.981 99.231,145.981 ; v1@87.944,147.306 cw(c88.414,146.836) 88.414,147.5 cw(c88.414,148.164) v1@87.944,147.694 ; 96.416,145.981 cw(c96.416,144.166) pad.ICT@97.699,145.449 ; 97.02,145.981 cw(c97.02,144.77) pad.ICT@97.876,145.626 ; pad.ICT@98.145,145.652 cw(c98.762,145.238) 98.762,145.981 ; pad.ICT@98.353,145.513 cw(c99.231,144.923) 99.231,145.981 ; 116.21,150.64 ccw(c116.85,151.28) RC56.1@116.85,150.375 ; 116.331,150.519 cw(c115.861,150.05) RC56.1@116.525,150.05 ; RC56.1@116.85,150 115.85,151 112.25,151 111.5,150.25 110,150.25 109,149.25 106.75,149.25 104.75,147.25 100.5,147.25 99.231,145.981